# Altium PCB V0.0.PcbDoc
Units mil, origin at the board's own origin, x right, y up, seen from the top; angles counter-clockwise.
Board outline 6000 x 4000 mil, 2 copper layers (Top Layer, Bottom Layer); 70 components, 0 nets, 233 pads, 74 vias.
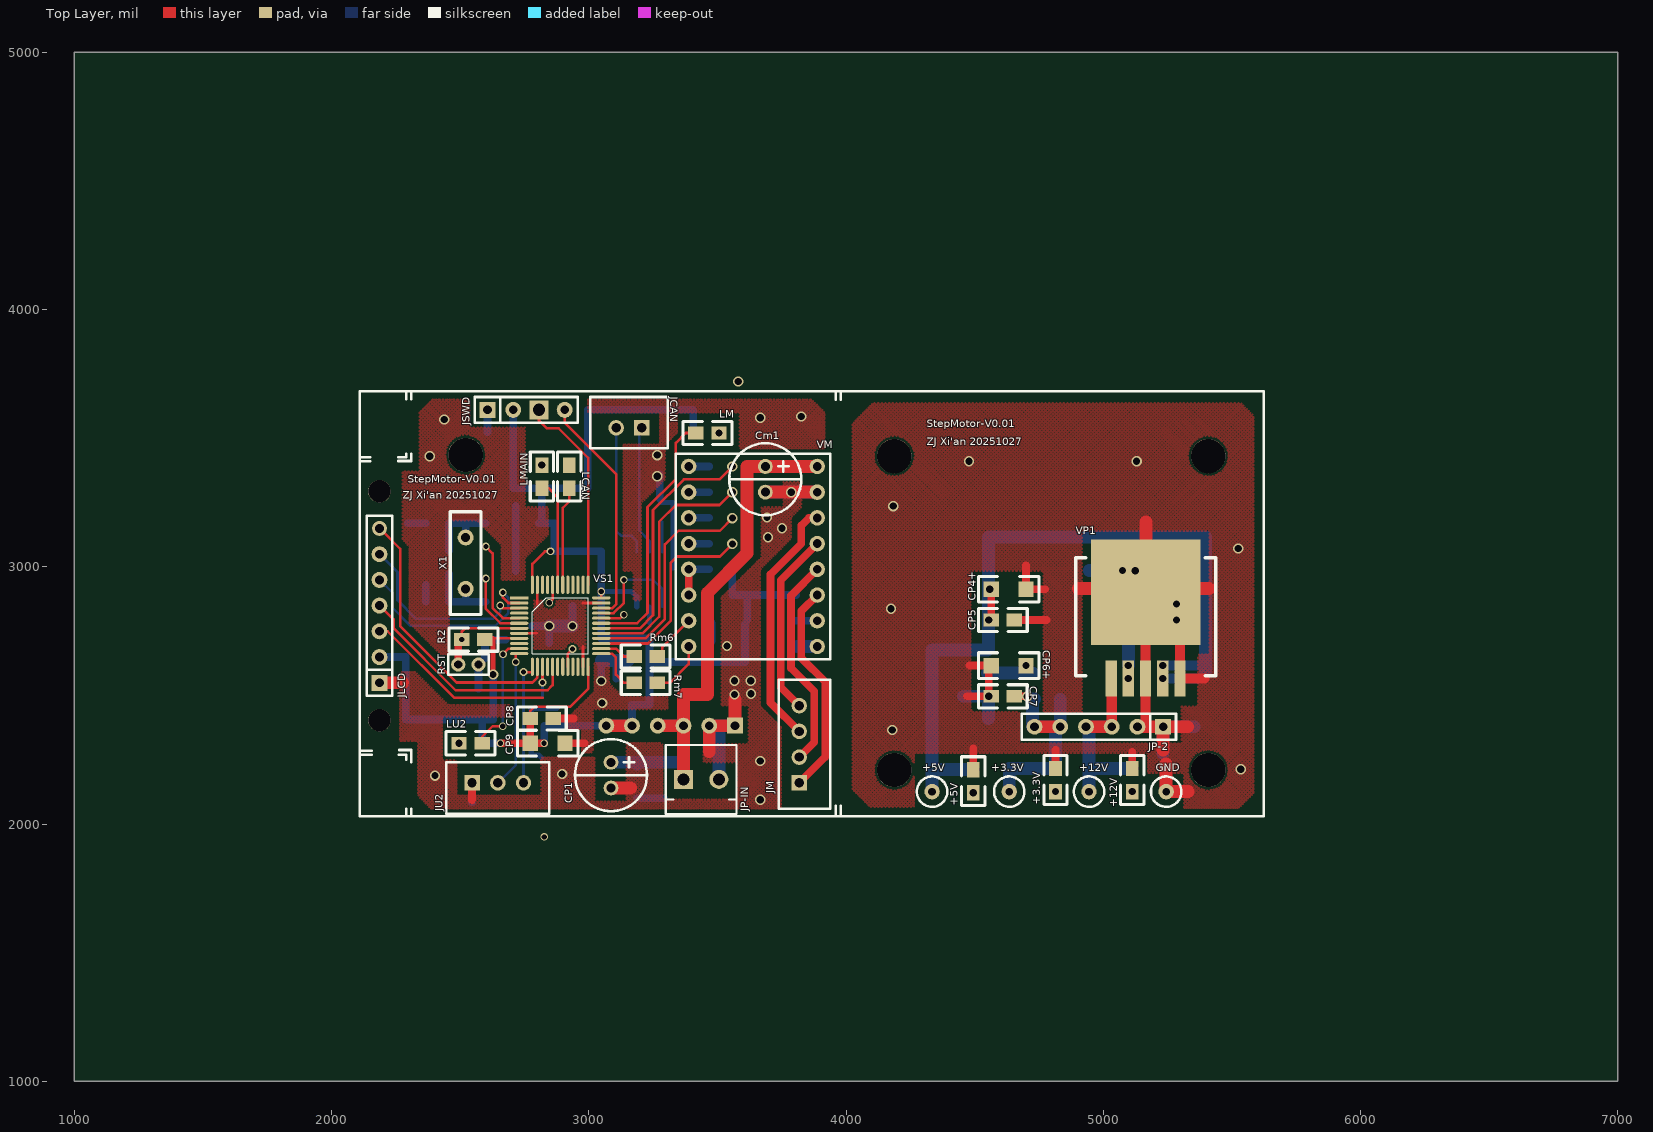
[diagram p0: Top Layer view]
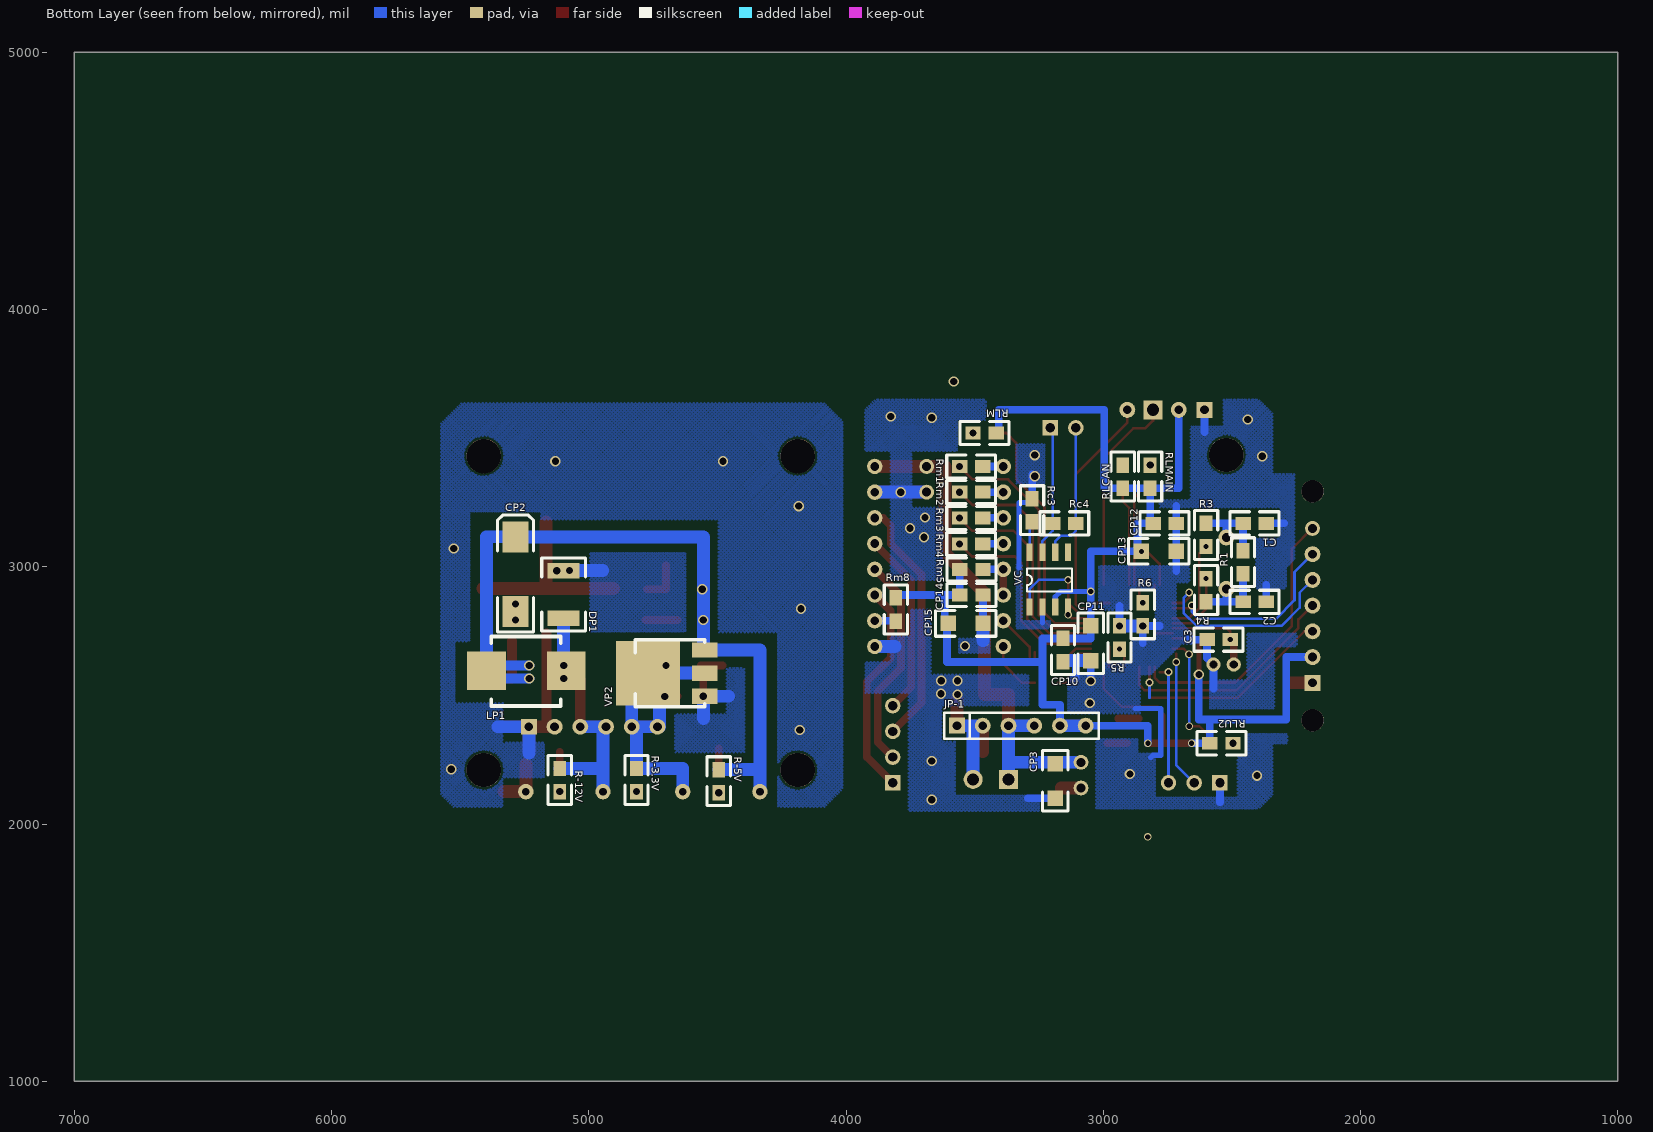
[diagram p1: Bottom Layer view, seen from below]

## Layer stack, top to bottom
Top Solder: solder mask 0.4, Solder Resist, Dk 3.5
Top Layer: signal copper 1.4
Dielectric 1: dielectric 12.6, FR-4, Dk 4.8
Bottom Layer: signal copper 1.4
Bottom Solder: solder mask 0.4, Solder Resist, Dk 3.5

## Board outline
1000,1000 7000,1000 7000,5000 1000,5000

## Design rules (kind name [scope] priority, off if disabled: settings)
Clearance [All] p1: gap=8
PolygonConnect [All] p1: connectstyle=Relief reliefconductorwidth=10 reliefentries=4 polygonreliefangle="90 Angle" airgapwidth=10
RoutingVias [All] p1: holewidth=28 width=50 viastyle="Through Hole" minholewidth=28 minwidth=50 maxholewidth=28 maxwidth=50
SolderMaskExpansion [All] p1: expansion=4
Width [All] p1: maxlimit=10 minlimit=10 preferedwidth=10
30 further rules are at their usual default settings.

## Components (designator, comment, footprint, x,y, rotation, side; value= is the part's Value field where it differs from the comment)
+3.3V "Comment" TestDot 4634.64,2125.8 r180 top
+3.3V "Comment" 0805#1 4814.64,2125.8 r90 top
+5V "Comment" TestDot 4334.64,2125.8 r180 top
+5V "Comment" 0805#1 4494.64,2121.39 r90 top
+12V "Comment" TestDot 4944.64,2125.8 r180 top
+12V "Comment" 0805#1 5112.91,2125.8 r90 top
C1 "Comment" 0805#2 2366.4,3168.74 r0 bottom
C2 "Comment" 0805#2 2366.4,2863.74 r0 bottom
C3 "Comment" 0805#2 2596.4,2716.65 r180 bottom
Cm1 "Comment" C+-6mm*12mm 3686.4,3390 r270 top
CP1 "Comment" C+-6mm*12mm 3086.4,2240 r270 top
CP2 "Comment" 7243 5284.64,3115.8 r90 bottom
CP3 "Comment" 1206#1 3186.4,2235 r270 bottom
CP4+ "Comment" 1206#2 4564.64,2912.3 r0 top
CP5 "Comment" 0805#2 4654.64,2793.36 r180 top
CP6+ "Comment" 1206#3 4699.64,2615.8 r180 top
CP7 "Comment" 0805#3 4564.64,2496.43 r0 top
CP8 "Comment" 0805#4 2862.54,2410 r180 top
CP9 "Comment" 1206#4 2907.54,2313.86 r180 top
CP10 "Comment" 0805#4 3156.4,2631.34 r90 bottom
CP11 "Comment" 1206#4 3048.53,2635 r90 bottom
CP12 "Comment" 0805#5 2806.4,3168.74 r180 bottom
CP13 "Comment" 1206#3 2851.4,3060 r180 bottom
CP14 "Comment" 0805#5 3557.29,2890 r180 bottom
CP15 "Comment" 1206#3 3602.29,2780 r180 bottom
DP1 "Comment" 1812 5097.64,2984.54 r270 bottom
GND "Comment" TestDot 5244.64,2125.8 r180 top
JCAN "Comment" SIP2-2.54 3206.4,3540 r180 top
JLCD "Comment" SIP07-2.54 2186.4,2549 r90 top
JM "Comment" SIP4-2.54 3818.29,2160 r90 top
JP-1 "Comment" SIP06-2.54#1 3568.21,2382.2 r180 bottom
JP-2 "Comment" SIP06-2.54#2 5232.91,2378 r180 top
JP-IN "Comment" KF350-2p-3.5 3368.21,2173.28 r0 top
JSWD "Comment" SIP04-2.54 2606.4,3610 r0 top
JU2 "Comment" SIP3-2.54 2546.4,2160 r0 top
LCAN "Comment" 0805#3 2924.19,3305.35 r90 top
LM "Comment" 0805#3 3416.4,3520 r0 top
LMAIN "Comment" 0805#3 2817.54,3305.35 r90 top
LP1 "Comment" 100uH/1A 5244.64,2598.8 r180 bottom
LU2 "Comment" 0805#3 2495.56,2313.86 r0 top
R1 "Comment" 0805#3 2456.4,2972.74 r90 bottom
R2 "Comment" 0805#6 2506.4,2716.65 r0 top
R3 "Comment" 0805#3 2599.86,3078.74 r90 bottom
R4 "Comment" 0805#3 2599.86,2954.13 r270 bottom
R5 "Comment" 0805#2 2936.4,2770 r270 bottom
R6 "Comment" 0805#2 2846.4,2770 r90 bottom
R-3.3V "Comment" 0805#7 4814.64,2215.8 r270 bottom
R-5V "Comment" 0805#8 4494.64,2211.39 r270 bottom
R-12V "Comment" 0805#9 5112.91,2215.8 r270 bottom
Rc3 "Comment" 0805#2 3276.4,3265 r270 bottom
Rc4 "Comment" 0805#3 3196.4,3168.74 r180 bottom
RLCAN "Comment" 0805#6 2924.19,3395.35 r270 bottom
RLM "Comment" 0805#7 3416.4,3520 r0 bottom
RLMAIN "Comment" 0805#6 2817.54,3395.35 r270 bottom
RLU2 "Comment" 0805#6 2495.56,2313.86 r0 bottom
Rm1 "Comment" 0805#3 3558.29,3390 r180 bottom
Rm2 "Comment" 0805#3 3558.29,3290 r180 bottom
Rm3 "Comment" 0805#3 3558.29,3189 r180 bottom
Rm4 "Comment" 0805#3 3558.29,3089 r180 bottom
Rm5 "Comment" 0805#7 3557.29,2990 r180 bottom
Rm6 "Comment" 0805#3 3176.4,2651.26 r0 top
Rm7 "Comment" 0805#3 3176.4,2549 r0 top
Rm8 "Comment" 0805#6 3806.4,2788.82 r90 bottom
RST "Comment" 2p-2mm 2492.66,2620 r0 top
VC "Comment" SOIC-8 3286.4,2843.74 r90 bottom
VM "Comment" motor_drv 3388.29,3390 r0 top
VP1 "Comment" LM2596 5162.64,2835.8 r0 top
VP2 "Comment" LM1117 4704.64,2586.43 r90 bottom
VS1 "Comment" LQFP48 2704.08,2605.55 r0 top
X1 "Comment" XTAL 2521.4,3113.74 r270 top

## Footprints (in the part's own frame and the unit in brackets; to place one, negate y for a bottom-side part, rotate by r counter-clockwise, add the part's x,y. Pads: shape width x height; smd on the part's side, far side on the other; paste and mask are expansions set on the pad)
2p-2mm [mm]
  round 1.4 hole 0.8: 1(0,0) 2(2,0)
  silkscreen extent -1,-1 3,1
100uH/1A [mil]
  rect 150x150 smd: 0(157,-3) FB/5V(-153,-3)
  silkscreen extent -135,-140 135,130
0805#1 [mil]
  rect 60x50 smd: 1(0,0) GND(90,0)
  silkscreen extent -50,-45 140,45
0805#2 [mil]
  rect 60x50 smd: 2(90,0) GND(0,0)
  silkscreen extent -50,-45 140,45
0805#3 [mil]
  rect 60x50 smd: 1(0,0) 2(90,0)
  silkscreen extent -50,-45 140,45
0805#4 [mil]
  rect 60x50 smd: +3.3V(90,0) GND(0,0)
  silkscreen extent -50,-45 140,45
0805#5 [mil]
  rect 60x50 smd: +3.3V(0,0) GND(90,0)
  silkscreen extent -50,-45 140,45
0805#6 [mil]
  rect 60x50 smd: 1(0,0) +3.3V(90,0)
  silkscreen extent -50,-45 140,45
0805#7 [mil]
  rect 60x50 smd: 2(90,0) +3.3V(0,0)
  silkscreen extent -50,-45 140,45
0805#8 [mil]
  rect 60x50 smd: 2(90,0) +5V(0,0)
  silkscreen extent -50,-45 140,45
0805#9 [mil]
  rect 60x50 smd: 2(90,0) +12V(0,0)
  silkscreen extent -50,-45 140,45
1206#1 [mil]
  rect 60x60 smd: 1(0,0) GND(135,0)
  silkscreen extent -50,-50 185,50
1206#2 [mil]
  rect 60x60 smd: +5V(0,0) GND(135,0)
  silkscreen extent -50,-50 185,50
1206#3 [mil]
  rect 60x60 smd: +3.3V(0,0) GND(135,0)
  silkscreen extent -50,-50 185,50
1206#4 [mil]
  rect 60x60 smd: +3.3V(135,0) GND(0,0)
  silkscreen extent -50,-50 185,50
1812 [mil]
  rect 60x125 smd: 2(185,0) GND(0,0)
  silkscreen extent -50,-85 235,85
7243 [mil]
  rect 120x100 smd: +5V(0,0) GND(-290,0)
  silkscreen extent -370,-70 85,70
C+-6mm*12mm [mil]
  round 58 hole 35: +(0,0) -(100,0)
  silkscreen extent -90,-140 190,140
KF350-2p-3.5 [mil]
  rect 74x74 hole 48: +12V(0,0)
  round 74 hole 48: GND(137.8,0)
  silkscreen extent -69,-134 207,134
LM1117 [mil]
  rect 60x100 smd: +3.3V(0,-155) +VIn(90,-155) GND(-90,-155)
  rect 250x250 smd: Vout(0,65)
  silkscreen extent -130,-155 130,115
LM2596 [mil]
  rect 44x140 smd: +5V(-65,-270) +Vin(-132,-270) FB(69,-270) GND(2,-270) O\N\/OFF(136,-270)
  rect 425x410 smd: GND(3,65)
  silkscreen extent -270,-260 275,200
LQFP48 [mm]
  rect 1.8x0.3 smd: 1(0.649,6.941)
  oval 1.8x0.3 smd: 2(0.649,6.441) 3(0.649,5.941) 4(0.649,5.441) 5(0.649,4.941) 6(0.649,4.441) 7(0.649,3.941) 8(0.649,3.441) 9(0.649,2.941) 10(0.649,2.441) 11(0.649,1.941) 12(0.649,1.441) 25(8.749,1.441) 26(8.749,1.941) 27(8.749,2.441) 28(8.749,2.941) 29(8.749,3.441) 30(8.749,3.941) 31(8.749,4.441) 32(8.749,4.941) 33(8.749,5.441) 34(8.749,5.941) 35(8.749,6.441) 36(8.749,6.941)
  oval 0.3x1.8 smd: 13(1.949,0.141) 14(2.449,0.141) 15(2.949,0.141) 16(3.449,0.141) 17(3.949,0.141) 18(4.449,0.141) 19(4.949,0.141) 20(5.449,0.141) 21(5.949,0.141) 22(6.449,0.141) 23(6.949,0.141) 24(7.449,0.141) 37(7.449,8.241) 38(6.949,8.241) 39(6.449,8.241) 40(5.949,8.241) 41(5.449,8.241) 42(4.949,8.241) 43(4.449,8.241) 44(3.949,8.241) 45(3.449,8.241) 46(2.949,8.241) 47(2.449,8.241) 48(1.949,8.241)
  silkscreen extent 1.95,1.44 7.45,6.94
motor_drv [mil]
  round 60 hole 34: 1(0,0) 2(0,-100) 3(0,-200) 4(0,-300) 5(0,-400) 6(0,-500) 7(0,-600) 8(0,-700) 9(500,-700) 10(500,-600) 11(500,-500) 12(500,-400) 13(500,-300) 14(500,-200) +(500,0) GND(500,-100)
  silkscreen extent -50,-750 550,50
SIP2-2.54 [mil]
  rect 60x60 hole 36: CANH(0,0)
  round 60 hole 36: CANL(100,0)
  silkscreen extent -100,-120 200,80
SIP3-2.54 [mil]
  rect 60x60 hole 36: GND(0,0)
  round 60 hole 36: RX(200,0) TX(100,0)
  silkscreen extent -100,-120 300,80
SIP4-2.54 [mil]
  round 60 hole 36: A1(100,0) B1(300,0) B2(200,0)
  rect 60x60 hole 36: A2(0,0)
  silkscreen extent -100,-120 400,80
SIP04-2.54 [mil]
  round 62 hole 34: +3.3V(100,0) SWDIO(300,0)
  rect 62x62 hole 34: GND(0,0)
  rect 74x74 hole 48: SWCLK(200,0)
  silkscreen extent -50,-50 350,50
SIP06-2.54#1 [mil]
  round 62 hole 34: 2(100,0) +3.3V(400,0) +3.3V(500,0) +12V(200,0) +12V(300,0)
  rect 62x62 hole 34: GND(0,0)
  silkscreen extent -50,-50 550,50
SIP06-2.54#2 [mil]
  round 62 hole 34: 2(100,0) 4(300,0) 6(500,0) +3.3V(400,0) +12V(200,0)
  rect 62x62 hole 34: GND(0,0)
  silkscreen extent -50,-50 550,50
SIP07-2.54 [mil]
  round 62 hole 34: +3.3V(100,0) D0(200,0) D1(300,0) DC(500,0) RES(400,0)
  round 58 hole 35: CS(600,0)
  rect 62x62 hole 34: GND(0,0)
  silkscreen extent -50,-50 650,50
SOIC-8 [mil]
  rect 67x24 smd: 1(0,0) 4(0,-150) 5(213,-150) 6(213,-100) 7(213,-50) 8(213,0) GND(0,-50) VCC(0,-100)
  silkscreen extent 60,-165 150,10
TestDot [mil]
  round 60 hole 30: 4(0,0)
  silkscreen extent -59,-59 59,59
XTAL [mil]
  round 62 hole 35.43: 1(0,0) 2(200,0)
  silkscreen extent -100,-60 300,60

## Free pads (board coordinates)
  round 133.86 hole 133.86: 2(2521.4,3434.57) 2(4187.63,2209.89) 2(4187.63,3430.37) 2(5408.1,2209.89) 2(5408.1,3430.37)
  round 86.61 hole 86.61: 3(2186.4,2403.09) 3(2186.4,3293.09)

## Via types
v1: diameter 40, hole 28, Top Layer to Bottom Layer, 55 vias
v2: diameter 30, hole 20, Top Layer to Bottom Layer, 19 vias

## Nets (pads, with @x,y where several pads share a name; then routed paths per layer and width w, separated by ;. In a path a pad name is that pad's centre, name@x,y a point inside that pad or via, vN(x,y) a via of type N, cw(c..) or ccw(c..) an arc to the next point about the centre after c; other vN are vias at no path point)
pads on no net: +3.3V.1 +3.3V.4 +3.3V.GND +5V.1 +5V.4 +5V.GND +12V.1 +12V.4 +12V.GND C1.2 C1.GND C2.2 C2.GND C3.2 C3.GND Cm1.+ Cm1.- CP1.+ CP1.- CP2.+5V CP2.GND CP3.1 CP3.GND CP4+.+5V CP4+.GND CP5.2 CP5.GND CP6+.+3.3V CP6+.GND CP7.1 CP7.2 CP8.+3.3V CP8.GND CP9.+3.3V CP9.GND CP10.+3.3V CP10.GND CP11.+3.3V CP11.GND CP12.+3.3V CP12.GND CP13.+3.3V CP13.GND CP14.+3.3V CP14.GND CP15.+3.3V CP15.GND DP1.2 DP1.GND GND.4 JCAN.CANH JCAN.CANL JLCD.+3.3V JLCD.CS JLCD.D0 JLCD.D1 JLCD.DC JLCD.GND JLCD.RES JM.A1 JM.A2 JM.B1 JM.B2 JP-1.2 JP-1.+3.3V JP-1.+12V JP-1.GND JP-2.2 JP-2.4 JP-2.6 JP-2.+3.3V JP-2.+12V JP-2.GND JP-IN.+12V JP-IN.GND JSWD.+3.3V JSWD.GND JSWD.SWCLK JSWD.SWDIO JU2.GND JU2.RX JU2.TX LCAN.1 LCAN.2 LM.1 LM.2 LMAIN.1 LMAIN.2 LP1.0 LP1.FB/5V LU2.1 LU2.2 R1.1 R1.2 R2.1 R2.+3.3V R3.1 R3.2 R4.1 R4.2 R5.2 R5.GND R6.2 R6.GND R-3.3V.2 R-3.3V.+3.3V R-5V.2 R-5V.+5V R-12V.2 R-12V.+12V Rc3.2 Rc3.GND Rc4.1 Rc4.2 RLCAN.1 RLCAN.+3.3V RLM.2 RLM.+3.3V RLMAIN.1 RLMAIN.+3.3V RLU2.1 RLU2.+3.3V Rm1.1 Rm1.2 Rm2.1 Rm2.2 Rm3.1 Rm3.2 Rm4.1 Rm4.2 Rm5.2 Rm5.+3.3V Rm6.1 Rm6.2 Rm7.1 Rm7.2 Rm8.1 Rm8.+3.3V RST.1 RST.2 VC.1 VC.4 VC.5 VC.6 VC.7 VC.8 VC.GND VC.VCC VM.1 VM.2 VM.3 VM.4 VM.5 VM.6 VM.7 VM.8 VM.9 VM.10 VM.11 VM.12 VM.13 VM.14 VM.+ VM.GND VP1.+5V VP1.+Vin VP1.FB VP1.GND VP1.O\N\/OFF VP2.+3.3V VP2.+VIn VP2.GND VP2.Vout VS1.1 VS1.2 VS1.3 VS1.4 VS1.5 VS1.6 VS1.7 VS1.8 VS1.9 VS1.10 VS1.11 VS1.12 VS1.13 VS1.14 VS1.15 VS1.16 VS1.17 VS1.18 VS1.19 VS1.20 VS1.21 VS1.22 VS1.23 VS1.24 VS1.25 VS1.26 VS1.27 VS1.28 VS1.29 VS1.30 VS1.31 VS1.32 VS1.33 VS1.34 VS1.35 VS1.36 VS1.37 VS1.38 VS1.39 VS1.40 VS1.41 VS1.42 VS1.43 VS1.44 VS1.45 VS1.46 VS1.47 VS1.48 X1.1 X1.2
copper on no net: | length 42807.8
  Top Layer w10: 2186.4,2749 2218.54,2749 2477.54,2490 2820.18,2490 ; 2186.4,2849 2186.4,2850 2241.4,2795 2241.4,2761.26 2482.66,2520 2839.55,2520 2859.55,2540 2859.55,2611.1 ; 2186.4,3149 2186.4,3150 2266.4,3070 2266.4,2770 2486.4,2550 2780.49,2550 2800.49,2570 2800.49,2611.1 ; v2(2506.4,2716.65) 2506.4,2749 2518.11,2760.71 2729.63,2760.71 ; 2585.56,2313.86 2585.56,2339.16 2626.4,2380 v2(2665.56,2380) ; v2(2599.86,2954.13) 2599.86,2836.54 2656.01,2780.39 2729.63,2780.39 ; v2(2599.86,3078.74) 2626.4,3052.2 2626.4,2840 2666.32,2800.08 2729.63,2800.08 ; 2601.08,2721.34 2729.63,2721.34 ; v2(2656.01,2849) 2665.56,2839.45 2729.63,2839.45 ; v2(2666.01,2900) 2666.01,2880.39 2687.26,2859.13 2729.63,2859.13 ; v2(2666.4,2660) 2688.37,2681.97 2729.63,2681.97 ; v2(2716.4,2630) 2716.4,2662.28 ; 2729.63,2741.02 2797.7,2741.02 ; v2(2746.4,2590.63) 2780.81,2590.63 ; 2772.54,2410 2772.54,2440 2787.54,2455 2927,2455 2997.34,2525.34 2997.34,2611.1 ; 2780.81,2930 2780.81,3010.91 2829.9,3060 v2(2851.4,3060) ; 2800.49,2855.04 2800.49,2930 ; 2806.4,3610 2806.4,3568.38 2837.01,3537.77 2883.34,3537.77 2997.34,3423.77 2997.34,2930 ; 2817.54,3305.35 2843.84,3305.35 2879.23,3269.96 2879.23,2930 ; v2(2820.18,2550) 2820.18,2611.1 ; v2(2846.4,2860) 2859.55,2873.15 2859.55,2930 ; 2898.92,2930 2898.92,3228.74 2924.19,3254.02 2924.19,3305.35 ; 2906.4,3610 2906.4,3560 3106.4,3360 3106.4,2853.74 3092.11,2839.45 3048.53,2839.45 ; 2918.6,2611.1 2918.6,2662.2 v2(2936.4,2680) ; 2976.4,2859.13 3048.53,2859.13 ; 2977.66,2611.1 2977.66,2690.14 ; 3048.53,2662.28 3089.82,2662.28 3105.69,2646.42 3105.69,2581.02 3137.71,2549 3176.4,2549 ; 3048.53,2681.97 3105.69,2681.97 3136.4,2651.26 3176.4,2651.26 ; 3048.53,2701.65 3229.94,2701.65 3318.29,2790 3318.29,3015 3343.29,3040 3509.29,3040 v1(3558.29,3089) ; 3048.53,2721.34 3219.86,2721.34 3296.08,2797.56 3296.08,3086.8 3349.29,3140 3509.29,3140 v1(3558.29,3189) ; 3048.53,2741.02 3208.6,2741.02 3273.29,2805.71 3273.29,3175 3338.29,3240 3508.29,3240 v1(3558.29,3290) ; 3048.53,2760.71 3198.6,2760.71 3249.63,2811.73 3249.63,3220 3369.63,3340 3508.29,3340 v1(3558.29,3390) ; 3048.53,2780.39 3187.82,2780.39 3228.29,2820.87 3228.29,3231.89 3338.29,3341.89 3338.29,3481.89 3376.4,3520 3416.4,3520 ; 3048.53,2800.08 3122.74,2800.08 v2(3136.4,2813.74) ; 3048.53,2819.76 3096.4,2819.76 3136.4,2859.76 v2(3136.4,2949) ; 3048.53,2878.82 v2(3048.53,2903.74) ; 3266.4,2549 3315.4,2549 3388.29,2621.89 3388.29,2690 ; 3266.4,2640 3266.4,2668.11 ; 3286.4,2651.26 3286.4,2688.11 3388.29,2790 ; 3707.55,2970 3707.55,2971.15 ; 4888.33,2900.8 4903.33,2915.8 ; 5411.45,2915.8 5426.45,2900.8
  Top Layer w20: v1(2628.25,2581.02) 2628.25,2720
  Top Layer w30: 2492.66,2620 v2@2492.66,2716.54 ; 2546.4,2091.95 2546.4,2160 ; v2(2656.4,2313.86) 2772.54,2313.86 v2(2826.4,2313.86) ; 2772.54,2322.72 2772.54,2420 ; 2862.54,2410 2941.98,2410 ; 2907.54,2313.86 2983.63,2313.86 ; 3388.29,2889 3388.29,2989 ; 3706.4,2971.15 3706.4,2471.89 3818.29,2360 ; 3707.55,2971.15 3826.4,3090 3826.4,3160 3856.4,3190 3888.29,3190 ; 3818.29,2160 3919.09,2260.8 3919.09,2552.74 3826.4,2645.43 3826.4,2828.11 3888.29,2890 ; 3818.29,2260 3876.66,2318.37 3876.66,2515.31 3786.4,2605.57 3786.4,2888.11 3888.29,2990 ; 3818.29,2460 3746.4,2531.89 3746.4,2948.11 3888.29,3090 ; 4470.5,2496.43 v1@4564.64,2496.43 ; 4479.74,2615.8 4564.64,2615.8 ; 4494.64,2211.39 4494.64,2294.26 ; v1(4554.64,2496.43) 4554.64,2615.8 ; v1@4564.64,2793.36 v1@4564.64,2912.3 ; 4654.64,2496.43 v1@4704.01,2496.43 ; 4654.64,2793.36 4779.47,2793.36 ; 4699.64,3005.35 4699.64,2912.3 4773.27,2912.3 ; 4814.64,2215.8 4814.64,2288.99 ; 5112.91,2215.8 5112.91,2280.95
  Top Layer w40: 5032.91,2378 5032.91,2563.53 ; 5164.64,2385.8 5164.64,2565.8 5164.64,2739.8 ; 5298.64,2711.8 5298.64,2565.8 5393,2565.8
  Top Layer w50: 2186.4,2549 2276.69,2549 ; 3068.21,2382.2 3168.21,2382.2 ; 3086.4,2140 3163.03,2140 ; 3268.21,2382.2 3368.21,2382.2 ; 3368.21,2173.28 3368.21,2382.2 ; 3468.21,2281.89 3468.21,2382.2 3568.21,2382.2 v1@3568.21,2484.35 ; 3686.4,3290 v1(3787.13,3290) 3888.29,3290 ; 3888.29,3390 3686.4,3390 3615.56,3390 3615.56,3052.32 3461.73,2898.49 3461.73,2504 3368.21,2504 3368.21,2382.2 ; 4732.91,2378 4832.91,2378 ; 4903.33,2915.8 5165.64,2915.8 ; 4932.91,2378 5032.91,2378 ; 5132.91,2378 5232.91,2378 ; 5165.64,3174.21 5165.64,2915.8 ; 5232.91,2288.23 5232.91,2378 ; 5244.64,2233.44 5244.64,2125.8 5330.5,2125.8 ; 5327.21,2378 5232.91,2378 ; 5411.45,2915.8 5165.64,2915.8
  Bottom Layer w10: 2186.4,2949 2236.4,2899 2236.4,2840.71 2307.11,2770 2636.4,2770 2687.26,2820.87 2687.26,2878.74 v2(2666.01,2900) ; 2186.4,3049 2256.4,2979 2256.4,2870 2328.84,2797.56 2628.25,2797.56 2656.01,2825.32 v2(2656.01,2849) ; 2646.4,2160 2716.4,2230 v2(2716.4,2630) ; v2@2666.4,2380.84 v2(2666.4,2660) ; 2746.4,2160 v2(2746.4,2590.63) ; 2820.18,2490 v2(2820.18,2550) ; 3106.4,3540 3106.4,3168.74 3106.4,3140 3126.4,3120 3166.4,3120 3186.4,3100 3186.4,3056.74 ; v2(3136.4,2949) 3250.63,2949 3286.4,2913.23 3286.4,2843.74 ; 3206.4,3540 3196.4,3530 3196.4,3168.74 3196.4,3140 3236.4,3100 3236.4,3056.74 ; 3286.4,3056.74 3286.4,3175
  Bottom Layer w20: 2815.47,2258.72 2806.66,2267.52 2776.3,2267.52 2776.3,2449.47 2875.89,2449.47 ; v2(3048.53,2903.74) 3166.4,2903.74 3186.4,2883.74 3186.4,2843.74 ; 3236.4,2781.69 3236.4,2843.74 ; 3278.42,3250 3327.84,3250 3327.84,2996.31
  Bottom Layer w30: 2186.4,2649 2288.91,2649 2288.91,2405.84 2585.56,2405.84 ; 2296.6,3168.74 2366.4,3168.74 ; 2366.4,2863.74 2366.4,2929.93 ; 2456.4,2863.74 2456.4,2972.74 ; 2456.4,3062.74 2456.4,3168.74 2599.86,3168.74 ; 2456.79,2864.13 2599.86,2864.13 ; 2521.4,2869.13 2521.4,2913.74 ; 2521.4,3113.74 2521.4,3163.74 ; 2546.4,2084.96 2546.4,2160 ; 2571.4,2526.82 2571.4,2620 2596.4,2645 2596.4,2716.65 2676.38,2716.65 ; 2606.4,3523.48 2606.4,3610 ; v1(2628.25,2581.02) 2628.25,2405.84 2585.56,2405.84 ; v2(2656.4,2313.86) 2585.56,2313.86 2585.56,2405.84 ; 2706.4,3610 2706.4,3305.35 2817.54,3305.35 ; 2716.4,2982.94 2716.4,3060 2716.4,3168.74 2716.4,3237.5 ; 2780.64,2770 v1(2846.4,2770) 2846.4,2702.82 ; 2806.4,3168.74 2866.4,3168.74 2866.4,3062.74 ; 2817.54,3177.64 2817.54,3305.35 ; v2(2826.4,2313.86) 2826.4,2382.2 3068.21,2382.2 ; v2(2851.4,3060) 3048.53,3060 v2(3048.53,2903.74) 3048.53,2721.34 3156.4,2721.34 3236.4,2721.34 3236.4,2463.19 3168.21,2463.19 3168.21,2382.2 ; v1(2936.4,2770) 2936.4,2847.46 ; v1(3048.53,2555.74) 3048.53,2635 ; 3106.4,2564.33 3106.4,2635 ; 3186.4,2100 3293.55,2100 ; 3236.4,2630 3607.29,2630 3607.29,2775 ; 3276.4,3265 v1@3276.4,3359.1 ; 3388.29,2990 3467.29,2990 ; 3388.29,3090 3467.29,3090 ; 3388.29,3190 3467.29,3190 ; 3388.29,3290 3468.29,3290 ; 3388.29,3390 3468.29,3390 ; 3406.4,3530 3406.4,3610 2996.4,3610 2996.4,3305.35 2924.19,3305.35 2817.54,3305.35 ; 3467.29,2780 3467.29,2890 ; 3557.29,2990 3557.29,2890 3806.4,2890 ; 3616.4,2791.89 3616.4,2890 ; 3806.4,2790 3888.29,2790
  Bottom Layer w40: v1(5231.64,2565.8) 5364.64,2565.8 ; v1(5231.64,2615.8) 5364.64,2615.8
  Bottom Layer w50: v1(2846.4,2770) v1(2936.4,2770) ; 3048.53,2635 3152.74,2635 ; 3068.21,2382.2 3168.21,2382.2 ; 3086.4,2240 3176.4,2240 ; 3188.6,2232.8 3195.81,2240 3368.21,2240 3368.21,2179.61 3358.6,2170 ; 3268.21,2382.2 3368.21,2382.2 3368.21,2173.28 ; 3467.29,2712.55 3467.29,2780 ; 3468.21,2382.2 3568.21,2382.2 ; 3506.01,2173.28 3506.01,2375 ; 3686.4,3290 3888.29,3290 ; 3809.38,2690 3888.29,2690 ; 4334.64,2125.8 4334.64,2676.43 4549.64,2676.43 ; 4339.05,2211.39 4494.64,2211.39 ; 4456.39,2496.43 v1(4554.64,2496.43) 4554.64,2410.82 ; 4549.64,2586.43 4724.64,2586.43 ; 4554.64,2681.43 4554.64,3115.8 5284.64,3115.8 ; 4634.64,2125.8 4634.64,2215.8 4814.64,2215.8 4814.64,2378 ; 4732.91,2485.8 4724.64,2485.8 4724.64,2378 4832.91,2378 4832.91,2483.8 ; 4932.91,2378 5032.91,2378 ; 4944.64,2125.8 4944.64,2378 ; 4944.64,2215.8 5112.91,2215.8 ; 4945.76,2985.8 v1(5074.64,2985.8) ; v1(5097.64,2615.8) 5097.64,2799.54 ; 5232.91,2275.79 5232.91,2378 5353.82,2378 ; 5285.38,3116.54 5397.64,3116.54 5397.64,2595.8
  other v1: 3666.4,2094.47 4494.64,2121.39 4814.64,2125.8 5112.91,2125.8 2402.29,2188.01 2896.4,2194.5 5534.64,2212.77 3666.4,2244.74 2495.56,2313.86 4179.53,2365.8 3051.98,2470 4704.64,2495.8 3566.4,2503.58 3630.8,2506.62 3566.4,2556.87 3629.98,2556.87 5097.64,2565.8 4699.64,2615.8 3537.08,2691.73 4554.64,2793.36 5284.64,2793.36 4174.64,2836.92 5284.64,2854.93 4558.9,2912.3 5124.64,2984.54 5524.64,3071.3 3696.4,3114.42 3751.09,3150 3692.57,3191.89 4183.73,3235.8 3266.4,3351.85 2817.54,3395.35 4478.53,3410.3 5129.85,3410.3 2382.15,3430 3266.4,3433.95 3506.4,3520 2438.01,3572.12 3666.4,3579.39 3826.4,3583.81 3581.45,3720
  other v2: 2827.16,1950

## Polygon pours and split planes (outlines as drawn)
no net on Bottom Layer "Bottom Layer-No Net" (hatched 45Degree grid 10 track 8, pour order 18): 3456.4,3650 3886.4,3650 3926.4,3610 3926.4,3590 3926.4,3450 3826.4,3450 3826.4,2950 3826.4,2949 3627.1,2949 3626.4,2948.3 3626.4,2946.55 3626.4,3230 3746.4,3230 3746.4,3450 3568.21,3450 3568.21,3570 3456.4,3570 3456.4,3650
no net on Bottom Layer "Bottom Layer-No Net" (hatched 45Degree grid 10 track 8, pour order 10): 3206.4,2790 3206.4,2760 3336.4,2760 3336.4,3010 3316.4,3010 3316.4,2790 3206.4,2790
no net on Bottom Layer "Bottom Layer-No Net" (hatched 45Degree grid 10 track 8, pour order 24): 3670.56,2833.41 3746.4,2833.41 3746.4,2730 3826.4,2730 3826.4,2630 3924.84,2630 3924.84,2511.56 3926.4,2510 3756.4,2510 3756.4,2050 3250.14,2050 3250.14,2110 3576.4,2110 3576.4,2320 3628.66,2320 3628.66,2460 3290.85,2460 3290.85,2581.02 3670.56,2581.02 3670.56,2832.88 3671.09,2833.41
no net on Bottom Layer "Bottom Layer-No Net" (hatched 45Degree grid 10 track 8, pour order 26): 2665.56,3001.99 2665.56,2938.71 2666.01,2938.26 2716.4,2938.26 2716.4,2801.02 2656.01,2740.62 2656.01,2740 2656.01,2700 2687.26,2700 2696.4,2700 2815.38,2581.02 2851.4,2581.02 2856.4,2581.02 2856.4,2430 3136.4,2430 3136.4,2577.87 2996.4,2577.87 2996.4,2630 2886.4,2630 2886.4,2716.65 2796.4,2716.65 2796.4,2916.5 2896.4,2916.5 2896.4,2832.88 3015.87,2832.88 3016.4,2833.41 3016.4,3001.99 2665.56,3001.99
no net on Bottom Layer "Bottom Layer-No Net" (hatched 45Degree grid 10 track 8, pour order 30): 2406.4,2915.25 2406.4,3110 2312.54,3110 2312.54,3230 2780.64,3230 2780.64,3260 2659.73,3260 2659.73,3545.01 2537.53,3545.01 2532.54,3550 2532.54,3650 2396.4,3650 2342.54,3596.14 2342.54,3580 2342.54,3360 2256.4,3360 2256.4,3030 2288.91,2997.49 2288.91,2915.25 2405.9,2915.25 2406.4,2915.75
no net on Bottom Layer "Bottom Layer-No Net" (hatched 45Degree grid 10 track 8, pour order 32): 2247.54,2737.67 2247.54,2690 2334.45,2690 2334.45,2449.47 2585.56,2449.47 2585.56,2558.93 2586.4,2559.77 2440.43,2559.77 2440.2,2560 2440.2,2737.15 2440.72,2737.67 2437.78,2740.62 2247.54,2740.62
no net on Bottom Layer "Bottom Layer-No Net" (hatched 45Degree grid 10 track 8, pour order 36): 2283.65,2350 2283.65,2313.86 2342.54,2313.86 2342.54,2112.52 2395.06,2060 2395.02,2060.04 2394.14,2060.04 3028.59,2060.04 3028.59,2060 3028.59,2330 2866.73,2330 2866.73,2273.49 2866.4,2273.17 2798.51,2273.17 2798.27,2272.93 2798.27,2102.47 2796.4,2102.47 2477.07,2102.47 2477.07,2260 2436.4,2260 2436.4,2350 2283.65,2350
no net on Bottom Layer "Bottom Layer-No Net" (hatched 45Degree grid 10 track 8, pour order 66): 3441.52,2721.34 3441.59,2721.41 3560.72,2721.41 3560.72,2664.84 3441.52,2664.84 3441.52,2721.34
no net on Bottom Layer "Bottom Layer-No Net" (hatched 45Degree grid 10 track 8, pour order 68): 4084.64,3635.8 4014.64,3565.8 4014.64,2135.8 4084.64,2065.8 4264.64,2065.8 4264.64,2744.8 4494.64,2744.8 4494.64,2745.8 4494.64,3184.8 5184.64,3184.8 5184.64,3215.8 5574.64,3215.8 5574.64,3555.8 5494.64,3635.8 4084.64,3635.8
no net on Bottom Layer "Bottom Layer-No Net" (hatched 45Degree grid 10 track 8, pour order 70): 4624.64,3052.54 4624.64,2747.63 4994.64,2747.63 4994.64,3052.54 4626.05,3052.54 4624.64,3053.95
no net on Bottom Layer "Bottom Layer-No Net" (hatched 45Degree grid 10 track 8, pour order 74): 5574.64,3215.8 5574.64,2115.8 5524.64,2065.8 5335.53,2065.8 5334.64,2066.69 5334.64,2468.78 5333.9,2469.51 5521.56,2469.51 5521.56,2710.34 5467.1,2710.34 5464.64,2707.87 5464.64,3215.44 5464.99,3215.8 5574.64,3215.8
no net on Bottom Layer "Bottom Layer-No Net" (hatched 45Degree grid 10 track 8, pour order 76): 5334.64,2314.01 5332.85,2315.8 5174.64,2315.8 5174.64,2181.7 5175.3,2181.03 5334.64,2181.03 5334.64,2313.78
no net on Bottom Layer "Bottom Layer-No Net" (hatched 45Degree grid 10 track 8, pour order 92): 4394.64,2606.21 4463.93,2606.21 4464.35,2605.8 4464.35,2427.15 4662.58,2427.15 4663.93,2425.8 4664.64,2425.09 4664.64,2278.8 4394.64,2278.8 4394.64,2605.8
no net on Bottom Layer "Bottom Layer-No Net" (hatched 45Degree grid 10 track 8, pour order 94): 3228.85,3477.82 3228.85,3322.25 3228.98,3322.12 3336.4,3322.12 3336.4,3477.82 3226.4,3477.82
no net on Top Layer "Bottom Layer-No Net" (hatched 45Degree grid 10 track 8, pour order 16): 2786.4,2869.13 2786.4,2680 2986.4,2680 2986.4,2869.13 2786.4,2869.13
no net on Top Layer "Bottom Layer-No Net" (hatched 45Degree grid 10 track 8, pour order 40): 3606.4,2971.15 3516.4,2881.15 3516.4,2460 3666.4,2460 3666.4,2971.15 3606.4,2971.15
no net on Top Layer "Bottom Layer-No Net" (hatched 45Degree grid 10 track 8, pour order 42): 3621.81,2460 3621.81,2310 3446.4,2310 3446.4,2240 3576.4,2240 3576.4,2060 3746.4,2060 3746.4,2376.87 3663.27,2460 3620.85,2460
no net on Top Layer "Bottom Layer-No Net" (hatched 45Degree grid 10 track 8, pour order 46): 3605.54,2970.28 3670.83,3035.58 3670.83,3200 3670.83,3231.89 3756.4,3231.89 3756.4,3330 3826.4,3330 3826.4,3231.89 3786.4,3191.89 3786.4,3110 3666.4,2990 3666.4,2971.15 3606.4,2971.15 3605.54,2970.28
no net on Top Layer "Bottom Layer-No Net" (hatched 45Degree grid 10 track 8, pour order 48): 3576.4,2060 2386.4,2060 2336.4,2110 2814.72,2110 2814.72,2259.32 3022.54,2259.32 3022.54,2086.93 3146.4,2086.93 3146.4,2313.86 3286.4,2313.86 3286.4,2094.33 3576.4,2094.33 3576.4,2060
no net on Top Layer "Bottom Layer-No Net" (hatched 45Degree grid 10 track 8, pour order 52): 2336.4,2110 2336.4,2320 2333.68,2322.72 2266.4,2322.72 2266.4,2590 2326.4,2590 2454.24,2462.16 2698.55,2462.16 2698.55,2417.11 2698.05,2416.61 2698.55,2416.61 2432.74,2416.61 2429.35,2420 2429.35,2247.89 2482.66,2247.89 2485.92,2244.63 2485.92,2110 2336.4,2110
no net on Top Layer "Bottom Layer-No Net" (hatched 45Degree grid 10 track 8, pour order 54): 2996.4,3650 2996.4,3600 3586.4,3600 3586.4,3460 3919.09,3460 3916.4,3462.69 3916.4,3600 3866.4,3650 2997.54,3650
no net on Top Layer "Bottom Layer-No Net" (hatched 45Degree grid 10 track 8, pour order 56): 2423.92,2660 2456.4,2660 2456.4,3180 2459.03,3180 2565.63,3180 2655.63,3090 2660.15,3085.48 2660.15,2949.07 2752.47,2949.07 2752.54,2949 2752.54,2948.11 2752.54,3034.82 2837.72,3120 2841.3,3123.58 2841.3,3231.89 2752.54,3231.89 2752.54,3541.82 2538.22,3541.82 2536.4,3540 2536.4,3650 2392.54,3650 2342.54,3600 2342.54,3370 2276.4,3370 2276.4,3105.09 2301.49,3080 2302.54,3078.95 2302.54,2780 2303.92,2780 2423.92,2660
no net on Top Layer "Bottom Layer-No Net" (hatched 45Degree grid 10 track 8, pour order 58): 2924.82,2424.16 2924.19,2423.53 2924.19,2370 2973,2370 2973,2277.88 3015.42,2277.88 3015.42,2445.38 3306.66,2445.38 3306.4,2445.64 3306.4,2493.74 3132.31,2493.74 3079.03,2547.01 3078.9,2547.15 3078.9,2626.58 3022.54,2626.58 3022.54,2506.62 3022.54,2515.31 2931.39,2424.16 2926.15,2424.16
no net on Top Layer "Bottom Layer-No Net" (hatched 45Degree grid 10 track 8, pour order 60): 3143.04,3475 3296.08,3475 3296.4,3475 3296.4,3339.66 3202.1,3245.36 3202.1,2870 3201.23,2869.13 3174.72,2869.13 3174.72,2982.35 3173.81,2983.26 3134.56,2983.26 3134.56,3475 3143.04,3475
no net on Top Layer "Bottom Layer-No Net" (hatched 45Degree grid 10 track 8, pour order 62): 3296.4,3475 3343.52,3522.12 3343.52,3600 3276.89,3600 3276.89,3477.28 3279.17,3475 3293.31,3475
no net on Top Layer "Bottom Layer-No Net" (hatched 45Degree grid 10 track 8, pour order 80): 4104.64,3635.8 5533.77,3635.8 5534.64,3636.67 5584.64,3586.67 5584.64,3139.41 4028.25,3139.41 4024.64,3135.8 4024.64,3535.8 4024.64,3545.8 4024.64,3555.8 4104.64,3635.8
no net on Top Layer "Bottom Layer-No Net" (hatched 45Degree grid 10 track 8, pour order 82): 4024.64,3142.95 4024.64,2135.8 4094.64,2065.8 4264.64,2065.8 4264.64,2275.8 4264.99,2275.8 4674.64,2275.8 4675.11,2276.28 4675.11,2435.8 4494.64,2435.8 4484.64,2445.8 4484.64,2984.54 4916.94,2984.54 4916.94,3138 4915.53,3139.41 4911.91,3135.8 4024.64,3135.8 4024.64,3142.95
no net on Top Layer "Bottom Layer-No Net" (hatched 45Degree grid 10 track 8, pour order 84): 4767.17,2432.37 4767.17,2432.31 4767.17,2977.22 4765.75,2978.64 4765.75,2995.8 4913.34,2995.8 4916.94,2999.4 4916.94,2432.31 4767.17,2432.31
no net on Top Layer "Bottom Layer-No Net" (hatched 45Degree grid 10 track 8, pour order 86): 5584.64,3139.41 5584.64,2119.94 5527.05,2062.36 5524.64,2062.36 5314.64,2062.36 5314.64,2198.75 5174.64,2198.75 5174.64,2311.89 5304.64,2311.89 5304.64,2455.8 5304.64,2456.98 5367.1,2456.98 5368.08,2457.96 5368.08,2658.58 5368.58,2658.08 5414.64,2658.08 5414.1,2658.08 5414.1,3139.41 5583.8,3139.41
no net on Top Layer "Bottom Layer-No Net" (hatched 45Degree grid 10 track 8, pour order 88): 4675.11,2276.28 5174.15,2276.28 5174.64,2275.79 5174.64,2311.89 4678.38,2311.89 4675.11,2308.62 4675.11,2276.28

## Silkscreen, mask and mechanical layers (free items; w line width, h text height)
Top Overlay:
  lines w10: 2110.46,2030 5624.64,2030 5624.64,3682.33 2110.46,3682.33 2110.46,2030.46 ; 2110.46,2270 2155.58,2270 ; 2110.46,2284.74 2155.91,2284.74 ; 2110.46,3410 2150,3410 ; 2110.46,3425.75 2150,3425.75 ; 2260,3411.22 2290,3411.22 2310,3411.22 2310,3438.82 ; 2260,3425.75 2290,3425.75 2290,3439.77 ; 2261.95,2270 2290,2270 2290,2250 ; 2263.45,2287.81 2310,2287.81 2310,2240 ; 2290,2030 2290,2060 ; 2290,3651.09 2290,3682.33 ; 2310,2030 2310,2060 ; 2310,3651.41 2310,3682.33 ; 3960,2030 3960,2069.89 ; 3960,3650 3960,3681.42 ; 3980,2029.33 3980,2071.39 ; 3980,3650 3980,3681.42
  text "StepMotor-V0.01" at 4314.64,3542.61 h30
  text "ZJ Xi'an 20251027" at 4314.64,3471.9 h30
  text "StepMotor-V0.01" at 2296.4,3326.62 h30
  text "ZJ Xi'an 20251027" at 2276.4,3264.19 h30
Mechanical 1:
  circle w10: c4187.63,2209.89 r66.93
  circle w10: c5408.1,2209.89 r66.93
  circle w10: c4187.63,3430.37 r66.93
  circle w10: c5408.1,3430.37 r66.93
  circle w10: c2186.4,3293.09 r43.31
  circle w10: c2186.4,2403.33 r43.31